# EAGLE board HPK_asic_4x24_wider (EAGLE 9.4.2)
ETROC package
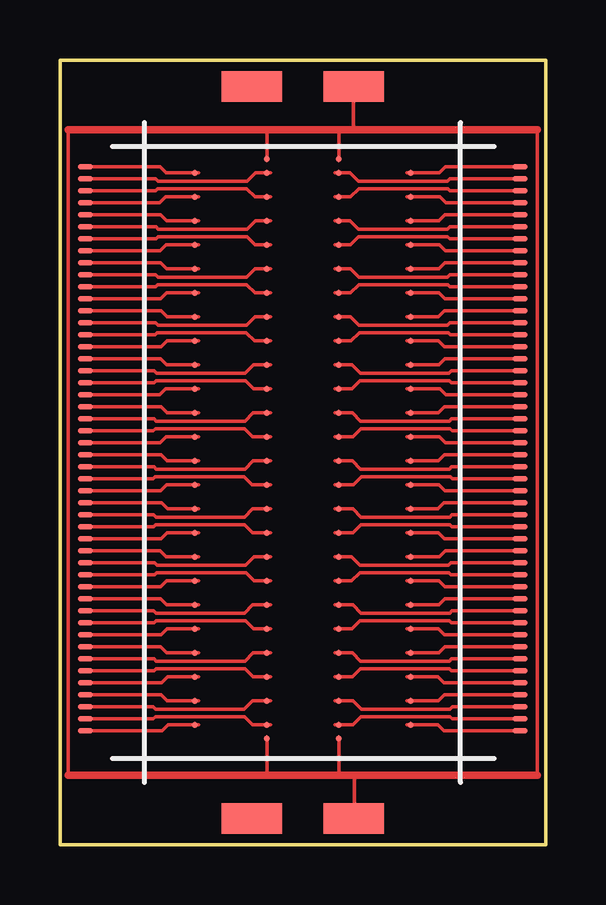
[diagram p0: board, top side]
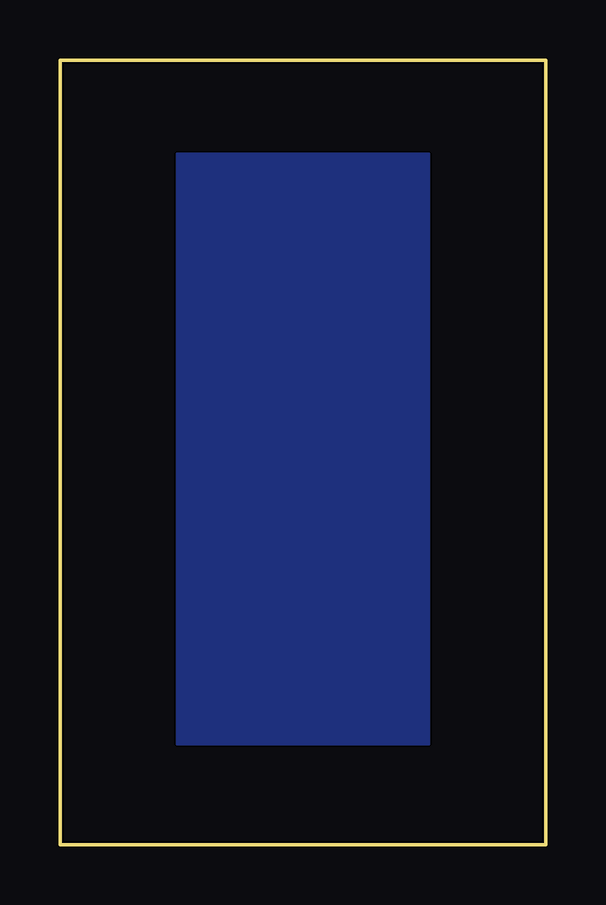
[diagram p1: board, bottom side, seen from below]

Size 20.25 x 32.7 mm. Coordinates in mm from the lower left corner, seen from the top.
Outline: 0,0 0,32.7 20.25,32.7 20.25,0 0,0
Copper layers (1*16): Top 0.035559375mm / dielectric 1.6mm / Bottom 0.035559375mm
Design rules "oshpark-2layer": minimum track width 6mil, minimum drill 10mil, track to track 6mil, track to pad 6mil, pad to pad 6mil, via to via 6mil, smd to smd 6mil, copper to edge 15mil, drill to drill 6mil, minimum pad ring 5mil, minimum via ring 5mil, stop-mask expansion 2.5mil, vias tented up to drill 0mil, thermal gap 10mil

## Footprints (pad centres in the part's own frame; a part is rotated, then mirrored left to right if it is on the bottom)
SMD1,27-2,54 = smd 1.27 x 2.54: 1 0,0
ETROC16X16 = smd 0.25 x 0.25: BB_1_0 6.63,26.165; BB_1_1 9.63,26.165; BB_4_0 6.63,2.035; BB_4_1 9.63,2.035; BB_6_0 3.63,25.6; BB_6_1 3.63,24.6; BB_6_2 3.63,23.6; BB_6_3 3.63,22.6; BB_6_4 3.63,21.6; BB_6_5 3.63,20.6; BB_6_6 3.63,19.6; BB_6_7 3.63,18.6; BB_6_8 3.63,17.6; BB_6_9 3.63,16.6; BB_6_10 3.63,15.6; BB_6_11 3.63,14.6; BB_6_12 3.63,13.6; BB_6_13 3.63,12.6; BB_6_14 3.63,11.6; BB_6_15 3.63,10.6; BB_6_16 3.63,9.6; BB_6_17 3.63,8.6; BB_6_18 3.63,7.6; BB_6_19 3.63,6.6; BB_6_20 3.63,5.6; BB_6_21 3.63,4.6; BB_6_22 3.63,3.6; BB_6_23 3.63,2.6; BB_7_0 6.63,25.6; BB_7_1 6.63,24.6; BB_7_2 6.63,23.6; BB_7_3 6.63,22.6; BB_7_4 6.63,21.6; BB_7_5 6.63,20.6; BB_7_6 6.63,19.6; BB_7_7 6.63,18.6; BB_7_8 6.63,17.6; BB_7_9 6.63,16.6; BB_7_10 6.63,15.6; BB_7_11 6.63,14.6; BB_7_12 6.63,13.6; BB_7_13 6.63,12.6; BB_7_14 6.63,11.6; BB_7_15 6.63,10.6; BB_7_16 6.63,9.6; BB_7_17 6.63,8.6; BB_7_18 6.63,7.6; BB_7_19 6.63,6.6; BB_7_20 6.63,5.6; BB_7_21 6.63,4.6; BB_7_22 6.63,3.6; BB_7_23 6.63,2.6; BB_8_0 9.63,25.6; BB_8_1 9.63,24.6; BB_8_2 9.63,23.6; BB_8_3 9.63,22.6; BB_8_4 9.63,21.6; BB_8_5 9.63,20.6; BB_8_6 9.63,19.6; BB_8_7 9.63,18.6; BB_8_8 9.63,17.6; BB_8_9 9.63,16.6; BB_8_10 9.63,15.6; BB_8_11 9.63,14.6; BB_8_12 9.63,13.6; BB_8_13 9.63,12.6; BB_8_14 9.63,11.6; BB_8_15 9.63,10.6; BB_8_16 9.63,9.6; BB_8_17 9.63,8.6; BB_8_18 9.63,7.6; BB_8_19 9.63,6.6; BB_8_20 9.63,5.6; BB_8_21 9.63,4.6; BB_8_22 9.63,3.6; BB_8_23 9.63,2.6; BB_9_0 12.63,25.6; BB_9_1 12.63,24.6; BB_9_2 12.63,23.6; BB_9_3 12.63,22.6; BB_9_4 12.63,21.6; BB_9_5 12.63,20.6; BB_9_6 12.63,19.6; BB_9_7 12.63,18.6; BB_9_8 12.63,17.6; BB_9_9 12.63,16.6; BB_9_10 12.63,15.6; BB_9_11 12.63,14.6; BB_9_12 12.63,13.6; BB_9_13 12.63,12.6; BB_9_14 12.63,11.6; BB_9_15 12.63,10.6; BB_9_16 12.63,9.6; BB_9_17 12.63,8.6; BB_9_18 12.63,7.6; BB_9_19 12.63,6.6; BB_9_20 12.63,5.6; BB_9_21 12.63,4.6; BB_9_22 12.63,3.6; BB_9_23 12.63,2.6 | smd 0.6 x 0.22: WB_5_1 -0.932,25.85; WB_5_2 -0.932,25.35; WB_5_3 -0.932,24.85; WB_5_4 -0.932,24.35; WB_5_5 -0.932,23.85; WB_5_6 -0.932,23.35; WB_5_7 -0.932,22.85; WB_5_8 -0.932,22.35; WB_5_9 -0.932,21.85; WB_5_10 -0.932,21.35; WB_5_11 -0.932,20.85; WB_5_12 -0.932,20.35; WB_5_13 -0.932,19.85; WB_5_14 -0.932,19.35; WB_5_15 -0.932,18.85; WB_5_16 -0.932,18.35; WB_5_17 -0.932,17.85; WB_5_18 -0.932,17.35; WB_5_19 -0.932,16.85; WB_5_20 -0.932,16.35; WB_5_21 -0.932,15.85; WB_5_22 -0.932,15.35; WB_5_23 -0.932,14.85; WB_5_24 -0.932,14.35; WB_5_25 -0.932,13.85; WB_5_26 -0.932,13.35; WB_5_27 -0.932,12.85; WB_5_28 -0.932,12.35; WB_5_29 -0.932,11.85; WB_5_30 -0.932,11.35; WB_5_31 -0.932,10.85; WB_5_32 -0.932,10.35; WB_5_33 -0.932,9.85; WB_5_34 -0.932,9.35; WB_5_35 -0.932,8.85; WB_5_36 -0.932,8.35; WB_5_37 -0.932,7.85; WB_5_38 -0.932,7.35; WB_5_39 -0.932,6.85; WB_5_40 -0.932,6.35; WB_5_41 -0.932,5.85; WB_5_42 -0.932,5.35; WB_5_43 -0.932,4.85; WB_5_44 -0.932,4.35; WB_5_45 -0.932,3.85; WB_5_46 -0.932,3.35; WB_5_47 -0.932,2.85; WB_5_48 -0.932,2.35; WB_5_51 17.192,25.85; WB_5_52 17.192,25.35; WB_5_53 17.192,24.85; WB_5_54 17.192,24.35; WB_5_55 17.192,23.85; WB_5_56 17.192,23.35; WB_5_57 17.192,22.85; WB_5_58 17.192,22.35; WB_5_59 17.192,21.85; WB_5_60 17.192,21.35; WB_5_61 17.192,20.85; WB_5_62 17.192,20.35; WB_5_63 17.192,19.85; WB_5_64 17.192,19.35; WB_5_65 17.192,18.85; WB_5_66 17.192,18.35; WB_5_67 17.192,17.85; WB_5_68 17.192,17.35; WB_5_69 17.192,16.85; WB_5_70 17.192,16.35; WB_5_71 17.192,15.85; WB_5_72 17.192,15.35; WB_5_73 17.192,14.85; WB_5_74 17.192,14.35; WB_5_75 17.192,13.85; WB_5_76 17.192,13.35; WB_5_77 17.192,12.85; WB_5_78 17.192,12.35; WB_5_79 17.192,11.85; WB_5_80 17.192,11.35; WB_5_81 17.192,10.85; WB_5_82 17.192,10.35; WB_5_83 17.192,9.85; WB_5_84 17.192,9.35; WB_5_85 17.192,8.85; WB_5_86 17.192,8.35; WB_5_87 17.192,7.85; WB_5_88 17.192,7.35; WB_5_89 17.192,6.85; WB_5_90 17.192,6.35; WB_5_91 17.192,5.85; WB_5_92 17.192,5.35; WB_5_93 17.192,4.85; WB_5_94 17.192,4.35; WB_5_95 17.192,3.85; WB_5_96 17.192,3.35; WB_5_97 17.192,2.85; WB_5_98 17.192,2.35

## Placement (x,y rotation side)
PAD1  [SMD1,27-2,54]  8,1.1 90 top
PAD2  [SMD1,27-2,54]  12.25,1.1 90 top
PAD3  [SMD1,27-2,54]  8,31.6 90 top
PAD4  [SMD1,27-2,54]  12.25,31.6 270 top
ROC1  ETROC16X16  [ETROC16X16]  2,2.4 0 top

## Library data of the parts
PAD1-PAD4 = wirepad
ROC1 = HPKasic_4x24_wider

## Tracks (layer width: path | path; a pad name or v marks a point on that pad's centre or on a via)
N$1
  Top 0.152: 19.91,29.8 19.91,2.9 | 0.34,2.9 0.34,29.8
  Top 0.305: 0.34,29.8 19.91,29.8 | 19.91,2.9 0.34,2.9
N$2
  Top 0.152: 11.62,4.46 11.62,2.94
N$3
  Top 0.152: 8.62,4.46 8.62,2.94
N$4
  Top 0.152: 14.47,28 15.83,28 16.08,28.25 19.35,28.25
N$5
  Top 0.152: 14.47,27 15.84,27 16.09,26.75 19.32,26.75
N$6
  Top 0.152: 5.78,28 4.42,28 4.17,28.25 0.9,28.25
N$7
  Top 0.152: 14.47,26 15.81,26 16.06,26.25 19.33,26.25
N$8
  Top 0.152: 14.47,25 15.82,25 16.07,24.75 19.33,24.75
N$9
  Top 0.152: 5.78,27 4.41,27 4.16,26.75 0.93,26.75
N$10
  Top 0.152: 5.78,26 4.44,26 4.19,26.25 0.92,26.25
N$11
  Top 0.152: 14.46,24 15.81,24 16.06,24.25 19.32,24.25
N$12
  Top 0.152: 14.46,23 15.8,23 16.05,22.75 19.33,22.75
N$13
  Top 0.152: 5.78,25 4.43,25 4.18,24.75 0.92,24.75
N$14
  Top 0.152: 5.79,24 4.44,24 4.19,24.25 0.93,24.25
N$15
  Top 0.152: 14.46,22 15.79,22 16.04,22.25 19.31,22.25
N$16
  Top 0.152: 14.46,21 15.78,21 16.03,20.75 19.31,20.75
N$17
  Top 0.152: 5.79,23 4.45,23 4.2,22.75 0.92,22.75
N$18
  Top 0.152: 5.79,22 4.46,22 4.21,22.25 0.94,22.25
N$19
  Top 0.152: 14.47,20 15.81,20 16.06,20.25 19.29,20.25
N$20
  Top 0.152: 14.47,19 15.84,19 16.09,18.75 19.3,18.75
N$21
  Top 0.152: 5.79,21 4.47,21 4.22,20.75 0.94,20.75
N$22
  Top 0.152: 5.78,20 4.44,20 4.19,20.25 0.96,20.25
N$23
  Top 0.152: 14.47,18 15.79,18 16.04,18.25 19.32,18.25
N$24
  Top 0.152: 14.47,17 15.82,17 16.07,16.75 19.35,16.75
N$25
  Top 0.152: 5.78,19 4.41,19 4.16,18.75 0.95,18.75
N$26
  Top 0.152: 5.78,18 4.46,18 4.21,18.25 0.93,18.25
N$27
  Top 0.152: 14.46,16 15.79,16 16.04,16.25 19.31,16.25
N$28
  Top 0.152: 14.46,15 15.8,15 16.05,14.75 19.31,14.75
N$29
  Top 0.152: 5.78,17 4.43,17 4.18,16.75 0.9,16.75
N$30
  Top 0.152: 5.79,16 4.46,16 4.21,16.25 0.94,16.25
N$31
  Top 0.152: 14.46,14 15.77,14 16.02,14.25 19.33,14.25
N$32
  Top 0.152: 14.47,13 15.78,13 16.03,12.75 19.33,12.75
N$33
  Top 0.152: 5.79,15 4.45,15 4.2,14.75 0.94,14.75
N$34
  Top 0.152: 5.79,14 4.48,14 4.23,14.25 0.92,14.25
N$35
  Top 0.152: 14.46,12 15.82,12 16.07,12.25 19.32,12.25
N$36
  Top 0.152: 14.47,11 15.81,11 16.06,10.75 19.32,10.75
N$37
  Top 0.152: 5.78,13 4.47,13 4.22,12.75 0.92,12.75
N$38
  Top 0.152: 5.79,12 4.43,12 4.18,12.25 0.93,12.25
N$39
  Top 0.152: 14.46,10 15.8,10 16.05,10.25 19.32,10.25
N$40
  Top 0.152: 14.47,9 15.79,9 16.04,8.75 19.31,8.75
N$41
  Top 0.152: 5.78,11 4.44,11 4.19,10.75 0.93,10.75
N$42
  Top 0.152: 5.79,10 4.45,10 4.2,10.25 0.93,10.25
N$43
  Top 0.152: 14.47,8 15.8,8 16.05,8.25 19.33,8.25
N$44
  Top 0.152: 14.47,7 15.77,7 16.02,6.75 19.34,6.75
N$45
  Top 0.152: 5.78,9 4.46,9 4.21,8.75 0.94,8.75
N$46
  Top 0.152: 5.78,8 4.45,8 4.2,8.25 0.92,8.25
N$47
  Top 0.152: 14.46,6 15.78,6 16.03,6.25 19.34,6.25
N$48
  Top 0.152: 14.46,5 15.75,5 16,4.75 19.31,4.75
N$49
  Top 0.152: 5.78,7 4.48,7 4.23,6.75 0.91,6.75
N$50
  Top 0.152: 5.79,6 4.47,6 4.22,6.25 0.91,6.25
N$51
  Top 0.152: 11.47,28 12.1,28 12.45,27.65 16.16,27.65 16.26,27.75 19.33,27.75
N$52
  Top 0.152: 11.47,26 12.1,26 12.45,25.65 16.15,25.65 16.25,25.75 19.35,25.75
N$53
  Top 0.152: 5.79,5 4.5,5 4.25,4.75 0.94,4.75
N$54
  Top 0.152: 8.78,28 8.15,28 7.8,27.65 4.09,27.65 3.99,27.75 0.92,27.75
N$55
  Top 0.152: 11.47,24 12.12,24 12.47,23.65 16.16,23.65 16.26,23.75 19.33,23.75
N$56
  Top 0.152: 11.47,22 12.12,22 12.47,21.65 16.16,21.65 16.26,21.75 19.3,21.75
N$57
  Top 0.152: 11.47,20 12.18,20 12.53,19.65 16.22,19.65 16.32,19.75 19.3,19.75
N$58
  Top 0.152: 11.47,18 12.19,18 12.54,17.65 16.23,17.65 16.33,17.75 19.32,17.75
N$59
  Top 0.152: 11.47,16 12.19,16 12.54,15.65 16.23,15.65 16.33,15.75 19.34,15.75
N$60
  Top 0.152: 11.47,14 12.21,14 12.56,13.65 16.25,13.65 16.35,13.75 19.34,13.75
N$61
  Top 0.152: 11.47,12 12.16,12 12.51,11.65 16.2,11.65 16.3,11.75 19.31,11.75
N$62
  Top 0.152: 11.47,10 12.21,10 12.56,9.65 16.25,9.65 16.35,9.75 19.35,9.75
N$63
  Top 0.152: 11.47,8 12.19,8 12.54,7.65 16.23,7.65 16.33,7.75 19.3,7.75
N$64
  Top 0.152: 11.47,6 12.22,6 12.57,5.65 16.26,5.65 16.36,5.75 19.33,5.75
N$65
  Top 0.152: 11.47,27 12.12,27 12.46,27.34 16.17,27.34 16.26,27.25 19.33,27.25
N$66
  Top 0.152: 11.47,25 12.11,25 12.45,25.34 16.16,25.34 16.25,25.25 19.33,25.25
N$67
  Top 0.152: 11.47,23 12.12,23 12.46,23.34 16.17,23.34 16.26,23.25 19.32,23.25
N$68
  Top 0.152: 8.78,26 8.15,26 7.8,25.65 4.1,25.65 4,25.75 0.9,25.75
N$69
  Top 0.152: 8.78,24 8.13,24 7.78,23.65 4.09,23.65 3.99,23.75 0.92,23.75
N$70
  Top 0.152: 8.78,22 8.13,22 7.78,21.65 4.09,21.65 3.99,21.75 0.95,21.75
N$71
  Top 0.152: 8.78,20 8.07,20 7.72,19.65 4.03,19.65 3.93,19.75 0.95,19.75
N$72
  Top 0.152: 8.78,18 8.06,18 7.71,17.65 4.02,17.65 3.92,17.75 0.93,17.75
N$73
  Top 0.152: 8.78,16 8.06,16 7.71,15.65 4.02,15.65 3.92,15.75 0.91,15.75
N$74
  Top 0.152: 8.78,14 8.04,14 7.69,13.65 4,13.65 3.9,13.75 0.91,13.75
N$75
  Top 0.152: 8.78,12 8.09,12 7.74,11.65 4.05,11.65 3.95,11.75 0.94,11.75
N$76
  Top 0.152: 8.78,10 8.04,10 7.69,9.65 4,9.65 3.9,9.75 0.9,9.75
N$77
  Top 0.152: 8.78,8 8.06,8 7.71,7.65 4.02,7.65 3.92,7.75 0.95,7.75
N$78
  Top 0.152: 8.78,6 8.03,6 7.68,5.65 3.99,5.65 3.89,5.75 0.92,5.75
N$79
  Top 0.152: 11.47,21 12.14,21 12.48,21.34 16.19,21.34 16.28,21.25 19.32,21.25
N$80
  Top 0.152: 11.47,19 12.18,19 12.52,19.34 16.23,19.34 16.32,19.25 19.31,19.25
N$81
  Top 0.152: 11.46,17 12.22,17 12.56,17.34 16.27,17.34 16.36,17.25 19.32,17.25
N$82
  Top 0.152: 11.47,15 12.23,15 12.57,15.34 16.28,15.34 16.37,15.25 19.31,15.25
N$83
  Top 0.152: 11.46,13 12.21,13 12.55,13.34 16.26,13.34 16.35,13.25 19.32,13.25
N$84
  Top 0.152: 11.47,11 12.16,11 12.5,11.34 16.21,11.34 16.3,11.25 19.31,11.25
N$85
  Top 0.152: 11.47,9 12.18,9 12.52,9.34 16.23,9.34 16.32,9.25 19.32,9.25
N$86
  Top 0.152: 11.47,7 12.19,7 12.53,7.34 16.24,7.34 16.33,7.25 19.33,7.25
N$87
  Top 0.152: 11.47,5 12.22,5 12.56,5.34 16.27,5.34 16.36,5.25 19.33,5.25
N$88
  Top 0.152: 12.24,29.78 12.24,31.46
N$89
  Top 0.152: 12.28,2.91 12.28,1.05
N$90
  Top 0.152: 8.78,27 8.13,27 7.79,27.34 4.08,27.34 3.99,27.25 0.92,27.25
N$91
  Top 0.152: 8.78,25 8.14,25 7.8,25.34 4.09,25.34 4,25.25 0.92,25.25
N$92
  Top 0.152: 8.78,23 8.13,23 7.79,23.34 4.08,23.34 3.99,23.25 0.93,23.25
N$93
  Top 0.152: 8.78,21 8.11,21 7.77,21.34 4.06,21.34 3.97,21.25 0.93,21.25
N$94
  Top 0.152: 8.78,19 8.07,19 7.73,19.34 4.02,19.34 3.93,19.25 0.94,19.25
N$95
  Top 0.152: 8.79,17 8.03,17 7.69,17.34 3.98,17.34 3.89,17.25 0.93,17.25
N$96
  Top 0.152: 8.78,15 8.02,15 7.68,15.34 3.97,15.34 3.88,15.25 0.94,15.25
N$97
  Top 0.152: 8.79,13 8.04,13 7.7,13.34 3.99,13.34 3.9,13.25 0.93,13.25
N$98
  Top 0.152: 8.78,11 8.09,11 7.75,11.34 4.04,11.34 3.95,11.25 0.94,11.25
N$99
  Top 0.152: 8.78,9 8.07,9 7.73,9.34 4.02,9.34 3.93,9.25 0.93,9.25
N$100
  Top 0.152: 8.78,7 8.06,7 7.72,7.34 4.01,7.34 3.92,7.25 0.92,7.25
N$101
  Top 0.152: 8.78,5 8.03,5 7.69,5.34 3.98,5.34 3.89,5.25 0.92,5.25
N$102
  Top 0.152: 11.62,28.52 11.62,29.74
N$103
  Top 0.152: 8.62,28.53 8.62,29.73
S$17
  pour Bottom: 4.88,28.8 15.38,28.8 15.38,4.2 4.88,4.2